# Altium PCB FunKello.PcbDoc
Units mm, origin at the board's own origin, x right, y up, seen from the top; angles counter-clockwise.
Board outline 145 x 33.3 mm, 2 copper layers (Top Layer, Bottom Layer), stack 1.671 mm thick; 59 components, 32 nets, 356 pads, 0 vias.
Unrouted connection lines stored in the file: 92.
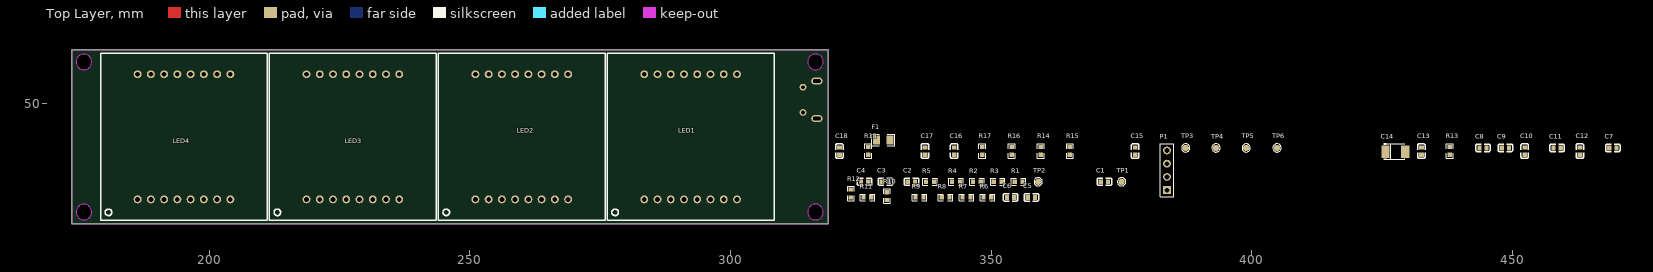
[diagram p0: Top Layer view]
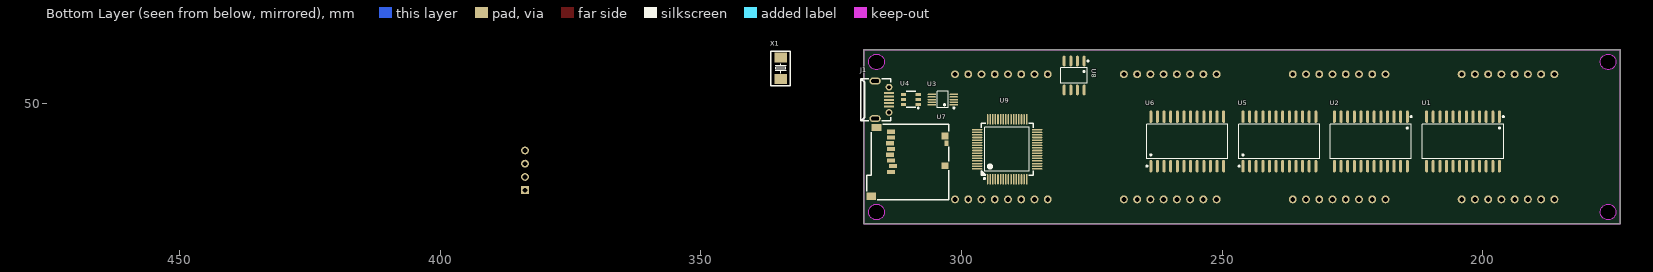
[diagram p1: Bottom Layer view, seen from below]

## Layer stack, top to bottom
Top Solder: solder mask 0.0102, Solder Resist, Dk 3.5
Top Layer: signal copper 0.0356
Dielectric 1: dielectric 1.6, FR-4, Dk 4.8
Bottom Layer: signal copper 0.0356
Bottom Solder: solder mask 0.0102, Solder Resist, Dk 3.5

## Board outline
173.7,27 318.7,27 318.7,60.3 173.7,60.3
cut-out: 314.8,29.2 ccw(c316.3,29.2) 316.3,27.7 ccw(c316.3,29.2) 317.8,29.2 ccw(c316.3,29.2) 316.3,30.7 ccw(c316.3,29.2)
cut-out: 314.8,58 ccw(c316.3,58) 316.3,56.5 ccw(c316.3,58) 317.8,58 ccw(c316.3,58) 316.3,59.5 ccw(c316.3,58)
cut-out: 174.5,29.2 ccw(c176,29.2) 176,27.7 ccw(c176,29.2) 177.5,29.2 ccw(c176,29.2) 176,30.7 ccw(c176,29.2)
cut-out: 174.5,58 ccw(c176,58) 176,56.5 ccw(c176,58) 177.5,58 ccw(c176,58) 176,59.5 ccw(c176,58)

## Design rules (kind name [scope] priority, off if disabled: settings)
Clearance [All] p1: gap=0.2
PolygonConnect [All] p1: connectstyle=Relief reliefconductorwidth=0.254 reliefentries=4 polygonreliefangle="90 Angle" airgapwidth=0.254
RoutingVias [All] p1: holewidth=0.711 width=1.27 viastyle="Through Hole" minholewidth=0.711 minwidth=1.27 maxholewidth=0.711 maxwidth=1.27
SolderMaskExpansion [All] p1: expansion=0.102
Width [All] p1: maxlimit=0.254 minlimit=0.254 preferedwidth=0.254
30 further rules are at their usual default settings.

## Classes and differential pairs
component class MCU: C7 C8 C9 C10 C11 C12 C13 C14 C15 C16 C17 C18 P1 R13 R14 R15 R16 R17 R18 TP3 TP4 TP5 TP6 U8 U9 X1
component class SD: C5 C6 R6 R7 R8 R9 R10 R11 R12 U7
component class TinyKello: LED1 LED2 LED3 LED4 U1 U2 U5 U6
component class USB: C1 C2 C3 C4 F1 F? J1 J? R1 R2 R3 R4 R5 TP1 TP2 U3 U4 U?

## Components (designator, comment, footprint, x,y, rotation, side; value= is the part's Value field where it differs from the comment)
C1 "100nF(104) ±10% 50V  0603" C0603 371,35 r0 top
C2 "100nF(104) ±10% 50V  0603" C0603 334,35 r0 top
C3 "10uF(106) ±10% 10V" C0603 329,35 r0 top
C4 "100nF(104) ±10% 50V  0603" C0603 325,35 r0 top
C5 "4.7uF(475) ±10% 50V 0603" C0603 357,32 r0 top
C6 "100nF(104) ±10% 50V 0603" C0603 353,32 r0 top
C7 "100nF(104) ±10% 50V  0603" C0603 468.499,41.5 r0 top
C8 "10uF(106) ±10% 10V  0603" C0603 443.599,41.5 r0 top
C9 "100nF(104) ±10% 50V  0603" C0603 447.899,41.5 r0 top
C10 "10uF(106) ±10% 10V  0603" C0603 452.299,40.2 r90 top
C11 "100nF(104) ±10% 50V  0603" C0603 457.799,41.5 r0 top
C12 "10uF(106) ±10% 10V  0603" C0603 462.899,40.2 r90 top
C13 "100nF(104) ±10% 50V  0603" C0603 432.499,40.2 r90 top
C14 "47uF(476) ±20% 10V  钽电容" CASE-B_3528 425.599,40.8 r0 top
C15 "100nF(104) ±10% 50V  0603" C0603 377.599,40.2 r90 top
C16 "100nF(104) ±10% 50V  0603" C0603 342.899,40.2 r90 top
C17 "20pF(200) ±1% 50V  0603" C0603 337.299,40.2 r90 top
C18 "20pF(200) ±1% 50V  0603" C0603 320.899,40.2 r90 top
F1 "6V 1.5A 1206 PTC自恢复保险丝" F1206 328,43 r0 top
J1 "MicroUSB母座 牛角 卷边" "MICRO USB 母座 小牛角有柱 卷边" 313.9,53.15 r270 bottom
LED1 "" matrix_led 283.464,31.626 r0 top locked
LED2 "" matrix_led 251.079,31.626 r0 top locked
LED3 "" matrix_led 218.694,31.626 r0 top locked
LED4 "" matrix_led 186.309,31.626 r0 top locked
P1 "SWD" HDR1X4 383.699,33.4 r90 top
R1 "33Ω(330) ±5%  0603" R0603 356,35 r0 top
R2 "33Ω(330) ±5%  0603" R0603 348,35 r0 top
R3 "33Ω(330) ±5%  0603" R0603 352,35 r0 top
R4 "33Ω(330) ±5%  0603" R0603 344,35 r0 top
R5 "1MΩ(1004) ±1%  0603" R0603 339,35 r0 top
R6 "10KΩ(10K) ±5% 0603" R0603 350,32 r0 top
R7 "10KΩ(10K) ±5% 0603" R0603 346,32 r0 top
R8 "10KΩ(10K) ±5% 0603" R0603 342,32 r0 top
R9 "33Ω(33R0) ±1%  0603" R0603 337,32 r0 top
R10 "10KΩ(10K) ±5% 0603" R0603 330,33 r90 top
R11 "10KΩ(10K) ±5% 0603" R0603 327,32 r0 top
R12 "10KΩ(10K) ±5% 0603" R0603 323.1,33.506 r90 top
R13 "0Ω ±1%" R0603 437.899,41.7 r90 top
R14 "10KΩ(10K) ±5% 0603" R0603 359.499,41.7 r90 top
R15 "10KΩ(10K) ±5% 0603" R0603 365.099,41.7 r90 top
R16 "10KΩ(10K) ±5% 0603" R0603 353.899,41.7 r90 top
R17 "10KΩ(10K) ±5% 0603" R0603 348.299,41.7 r90 top
R18 "1MΩ(1004) ±1%  0603" R0603 326.399,41.7 r90 top
TP1 "NC" TP 375,35 r90 top
TP2 "NC" TP 359,35 r90 top
TP3 "NC" TP 387.299,41.5 r90 top
TP4 "NC" TP 393.099,41.5 r90 top
TP5 "NC" TP 398.899,41.5 r90 top
TP6 "NC" TP 404.799,41.5 r90 top
U1 "MAX7219M" SOP-24_300mil 201.157,44.237 r0 bottom
U2 "MAX7219M" SOP-24_300mil 218.835,44.237 r0 bottom
U3 "CH340E" MSOP-10 303.7,50.3 r90 bottom
U4 "PTLC0514TS" SOT-236 311.1,51.75 r180 bottom
U5 "MAX7219M" SOP-24_300mil 241.705,41.251 r180 bottom
U6 "MAX7219M" SOP-24_300mil 259.383,41.251 r180 bottom
U7 "TXGA(特思嘉)/SD卡连接器 自弹式(H1.9)(内焊)/FCD407-6M" "Micro SD" 303.15,43.8 r270 bottom
U8 "AT24C02" SOIC-8_150mil 278.4,55.5 r0 bottom
U9 "AT32F415RBT7" LQFP64 297,45 r180 bottom
X1 "8MHz 20pF 20ppm/ TXC(台湾晶技)/7A08000001" CRY5032_2P_SMT 334.7,54.7 r90 bottom

## Footprints (in the part's own frame and the unit in brackets; to place one, negate y for a bottom-side part, rotate by r counter-clockwise, add the part's x,y. Pads: shape width x height; smd on the part's side, far side on the other; paste and mask are expansions set on the pad)
C0603 [mm]
  rect 0.8x0.9 smd: 1(0,0) 2(1.4,0)
  silkscreen extent -0.7,-0.7 2.1,0.72, body extent -0.17,-0.4 1.43,0.4, height 0.3
CASE-B_3528 [mm]
  rect 1.607x2.376 smd: 1(0,0) 2(3.822,0)
  silkscreen extent -0.3,-1.55 3.74,1.55, body extent 0.15,-1.56 3.85,1.37, height 2.03
CRY5032_2P_SMT [mm] "5032-2P贴片晶振"
  rect 1.9x2.4 smd: 1(0,0) 2(4.1,0)
  silkscreen extent -1.27,-1.85 5.38,1.85, body extent -0.5,-1.6 4.5,1.6, height 1.3
F1206 [mm]
  rect 1.293x1.782 smd: 1(0,0) 2(2.593,0)
  silkscreen extent -0.88,-1.12 3.47,1.12, body extent -0.3,-0.85 3.1,0.85, height 0.8
HDR1X4 [mm] "Connector; Header; 4 Position"
  rect 1.5x1.5 hole 0.9: 1(0,0)
  round 1.5 hole 0.9: 2(2.54,0) 3(5.08,0) 4(7.62,0)
  silkscreen extent -1.27,-1.27 8.89,1.27
LQFP64 [mm]
  oval 0.3x2 smd: 1(2,-9.5) 2(2.5,-9.5) 3(3,-9.5) 4(3.5,-9.5) 5(4,-9.5) 6(4.5,-9.5) 7(5,-9.5) 8(5.5,-9.5) 9(6,-9.5) 10(6.5,-9.5) 11(7,-9.5) 12(7.5,-9.5) 13(8,-9.5) 14(8.5,-9.5) 15(9,-9.5) 16(9.5,-9.5) 33(9.5,2) 34(9,2) 35(8.5,2) 36(8,2) 37(7.5,2) 38(7,2) 39(6.5,2) 40(6,2) 41(5.5,2) 42(5,2) 43(4.5,2) 44(4,2) 45(3.5,2) 46(3,2) 47(2.5,2) 48(2,2)
  oval 2x0.3 smd: 17(11.5,-7.5) 18(11.5,-7) 19(11.5,-6.5) 20(11.5,-6) 21(11.5,-5.5) 22(11.5,-5) 23(11.5,-4.5) 24(11.5,-4) 25(11.5,-3.5) 26(11.5,-3) 27(11.5,-2.5) 28(11.5,-2) 29(11.5,-1.5) 30(11.5,-1) 31(11.5,-0.5) 32(11.5,0) 49(0,0) 50(0,-0.5) 51(0,-1) 52(0,-1.5) 53(0,-2) 54(0,-2.5) 55(0,-3) 56(0,-3.5) 57(0,-4) 58(0,-4.5) 59(0,-5) 60(0,-5.5) 61(0,-6) 62(0,-6.5) 63(0,-7) 64(0,-7.5)
  silkscreen extent 0.75,-9.54 10.75,1.25, body extent -0.36,-9.75 11.79,2.39, height 1.62
matrix_led [mil] "点阵LED 32*32MM"
  round 60 hole 36: 1(0,0) 2(100,0) 3(200,0) 4(300,0) 5(400,0) 6(500,0) 7(600,0) 8(700,0) 9(700,944.88) 10(600,944.88) 11(500,944.88) 12(400,944.88) 13(300,944.88) 14(200,944.88) 15(100,944.88) 16(0,944.88)
  silkscreen extent -280,-157 980,1102, body extent -275,-160 985,1100, height 280
"Micro SD" [mm]
  rect 0.8x1.5 smd: 1(6.9,-10.36) 2(5.8,-9.96) 3(4.7,-10.36) 4(3.6,-10.56) 5(2.5,-10.36) 6(1.4,-10.56) 7(0.3,-10.36) 8(-0.8,-10.36)
  rect 1x0.85 smd: 9(1.39,0.275)
  rect 1.4x1.9 smd: 10(-1.6,-13.15) 10(11.55,-14.15)
  rect 1.3x1.4 smd: 10(0,0) 10(5.7,0)
  silkscreen extent -2.26,-15.07 12.21,0.68, body extent -2.25,-14.52 11.85,0.68, height 2
"MICRO USB 母座 小牛角有柱 卷边" [mm]
  rect 0.4x2 smd: 1(1.125,-0.008) 2(1.775,-0.008) 3(2.425,-0.008) 4(3.075,-0.008) 5(3.725,-0.008)
  round 1.3 hole 0.7: 6(4.85,0) 9(0,0)
  oval 1.3x2.2 hole 0.7 slot 1.5 at 90 deg: 7(6.025,-2.67) 8(-1.175,-2.67)
  silkscreen extent -1.58,-5.41 6.42,0.34, body extent -1.35,-4.87 6.15,0.63, height 2.62
MSOP-10 [mm]
  oval 0.28x1.62 smd: 1(-0.528,-2.238) 2(-0.028,-2.238) 3(0.472,-2.238) 4(0.972,-2.238) 5(1.472,-2.238) 6(1.472,1.982) 7(0.972,1.982) 8(0.472,1.982) 9(-0.028,1.982) 10(-0.528,1.982)
  silkscreen extent -1.27,-2.39 2.05,0.94, body extent -1,-2.75 2,2.15, height 1.15
R0603 [mm]
  rect 0.806x0.864 smd: 1(-1.506,0) 2(0,0)
  silkscreen extent -2.14,-0.66 0.63,0.66, body extent -1.6,-0.4 0,0.4, height 0.3
SOIC-8_150mil [mm]
  oval 0.588x2.045 smd: 1(-1.897,-2.66) 2(-0.627,-2.66) 3(0.643,-2.66) 4(1.913,-2.66) 5(1.913,2.885) 6(0.643,2.885) 7(-0.627,2.885) 8(-1.897,2.885)
  silkscreen extent -2.79,-2.81 2.53,1.63, body extent -2.5,-3.2 2.5,3, height 1.75
SOP-24_300mil [mm]
  oval 0.574x2.388 smd: 1(-4.317,-3.251) 2(-3.047,-3.251) 3(-1.777,-3.251) 4(-0.507,-3.251) 5(0.763,-3.251) 6(2.033,-3.251) 7(3.303,-3.251) 8(4.573,-3.251) 9(5.843,-3.251) 10(7.113,-3.251) 11(8.383,-3.251) 12(9.653,-3.251) 13(9.653,6.237) 14(8.383,6.237) 15(7.113,6.237) 16(5.843,6.237) 17(4.573,6.237) 18(3.303,6.237) 19(2.033,6.237) 20(0.763,6.237) 21(-0.507,6.237) 22(-1.777,6.237) 23(-3.047,6.237) 24(-4.317,6.237)
  silkscreen extent -5.21,-3.4 10.44,4.81, body extent -5.15,-3.8 10.55,6.66, height 2.54
SOT-236 [mm]
  rect 1x0.55 smd: 1(2.8,-1.9) 2(2.8,-0.95) 3(2.8,0) 4(0,0) 5(0,-0.95) 6(0,-1.9)
  silkscreen extent 0.5,-2.73 2.92,0.6, body extent 0.33,-2.36 2.67,0.56, height 1
TP [mm]
  round 1.2 smd: 1(0,0)
  silkscreen extent -0.8,-0.8 0.8,0.8

## Part data
C1 C2 C3 C4 C7 C8 C9 C10 C11 C12 C13 C15 C16 C17 C18: library part Cap, "0603贴片电容"
C5 C6: library part Cap, "Capacitor"
C14: library part "Cap Pol2", "CASE_B 3528钽电容"
F1: library part ASMD1206-150, "1206 PTC自恢复保险丝"
J1: library part CMP-0029-00002-1, "MicroUSB母座"
LED1 LED2 LED3 LED4: library part SLD0888DWC1BY
P1: library part "Header 4", "编程下载口"
R1 R2 R3 R4 R5 R13 R14 R15 R16 R17 R18: library part Res1, "0603贴片电阻"
R6 R7 R8 R9 R10 R11 R12: library part Res1, "Resistor"
TP1 TP2 TP3 TP4 TP5 TP6: library part TP, "测试点"
U3: "USB转串口IC"
U7: library part "SD CARD/FCD407-6M"
U8: library part 24CXX, "非易失性存储器(ROM)"
X1: library part XTAL_SMD, "无源晶振  SMD-5032_2P"

## Nets (pads, with @x,y where several pads share a name; then routed paths per layer and width w, separated by ;. In a path a pad name is that pad's centre, name@x,y a point inside that pad or via, vN(x,y) a via of type N, cw(c..) or ccw(c..) an arc to the next point about the centre after c; other vN are vias at no path point)
+3V3_CH340E: C3.2 C4.1 U3.7
+3V3_MAIN: C7.2 C8.2 C9.2 C10.2 C11.2 C12.2 C15.2 P1.4 R14.2 R15.2 R16.1 TP6.1 U8.8
+3V3_MIAN: C5.1 C6.2 R6.2 R7.2 R8.2 R10.2 R11.2 R12.2 U7.4
+3V3_TLV2333: C13.2 C14.1
+USB_VBUS: F1.2
+VBUS: F1.1 J1.1 U4.5
DM: J1.2 R1.2 U4.4
DP: J1.3 R2.2 U4.6
E0: C2.1 J1.6 J1.7 J1.8 J1.9 R5.1 U7.10
EE_SCL: R15.1 U8.6
EE_SDA: R14.1 U8.5
GND: C1.1 C2.2 C3.1 C4.2 C5.2 C6.1 C7.1 C8.1 C9.1 C10.1 C11.1 C12.1 C13.1 C14.2 C15.1 C16.1 C17.1 C18.1 J1.5 P1.3 R5.2 R13.1 R17.1 TP5.1 U3.3 U4.2 U7.6 U8.1 U8.2 U8.3 U8.4 U8.7
NetC1_2: C1.2 U3.10
NetC16_2: C16.2 R16.2
NetR1_1: R1.1 U3.2
NetR2_1: R2.1 U3.1
NetR3_1: R3.1 TP1.1
NetR3_2: R3.2 U3.9
NetR4_1: R4.1 TP2.1
NetR4_2: R4.2 U3.8
NetR9_1: R9.1 U7.5
OSC8M_1: C17.2 R18.1 X1.2
OSC8M_2: C18.2 R18.2 X1.1
SDIO_CLK: R9.2
SDIO_CMD: R8.1 U7.3
SDIO_D0: R10.1 U7.7
SDIO_D1: R11.1 U7.8
SDIO_D2: R6.1 U7.1
SDIO_D3: R7.1 U7.2
SDIO_SWI: R12.1 U7.9
SWCLK: P1.1 TP3.1
SWDIO: P1.2 TP4.1
pads on no net: J1.4 LED1.1 LED1.2 LED1.3 LED1.4 LED1.5 LED1.6 LED1.7 LED1.8 LED1.9 LED1.10 LED1.11 LED1.12 LED1.13 LED1.14 LED1.15 LED1.16 LED2.1 LED2.2 LED2.3 LED2.4 LED2.5 LED2.6 LED2.7 LED2.8 LED2.9 LED2.10 LED2.11 LED2.12 LED2.13 LED2.14 LED2.15 LED2.16 LED3.1 LED3.2 LED3.3 LED3.4 LED3.5 LED3.6 LED3.7 LED3.8 LED3.9 LED3.10 LED3.11 LED3.12 LED3.13 LED3.14 LED3.15 LED3.16 LED4.1 LED4.2 LED4.3 LED4.4 LED4.5 LED4.6 LED4.7 LED4.8 LED4.9 LED4.10 LED4.11 LED4.12 LED4.13 LED4.14 LED4.15 LED4.16 R13.2 R17.2 U1.1 U1.2 U1.3 U1.4 U1.5 U1.6 U1.7 U1.8 U1.9 U1.10 U1.11 U1.12 U1.13 U1.14 U1.15 U1.16 U1.17 U1.18 U1.19 U1.20 U1.21 U1.22 U1.23 U1.24 U2.1 U2.2 U2.3 U2.4 U2.5 U2.6 U2.7 U2.8 U2.9 U2.10 U2.11 U2.12 U2.13 U2.14 U2.15 U2.16 U2.17 U2.18 U2.19 U2.20 U2.21 U2.22 U2.23 U2.24 U3.4 U3.5 U3.6 U4.1 U4.3 U5.1 U5.2 U5.3 U5.4 U5.5 U5.6 U5.7 U5.8 U5.9 U5.10 U5.11 U5.12 U5.13 U5.14 U5.15 U5.16 U5.17 U5.18 U5.19 U5.20 U5.21 U5.22 U5.23 U5.24 U6.1 U6.2 U6.3 U6.4 U6.5 U6.6 U6.7 U6.8 U6.9 U6.10 U6.11 U6.12 U6.13 U6.14 U6.15 U6.16 U6.17 U6.18 U6.19 U6.20 U6.21 U6.22 U6.23 U6.24 U9.1 U9.2 U9.3 U9.4 U9.5 U9.6 U9.7 U9.8 U9.9 U9.10 U9.11 U9.12 U9.13 U9.14 U9.15 U9.16 U9.17 U9.18 U9.19 U9.20 U9.21 U9.22 U9.23 U9.24 U9.25 U9.26 U9.27 U9.28 U9.29 U9.30 U9.31 U9.32 U9.33 U9.34 U9.35 U9.36 U9.37 U9.38 U9.39 U9.40 U9.41 U9.42 U9.43 U9.44 U9.45 U9.46 U9.47 U9.48 U9.49 U9.50 U9.51 U9.52 U9.53 U9.54 U9.55 U9.56 U9.57 U9.58 U9.59 U9.60 U9.61 U9.62 U9.63 U9.64

## Keep-outs
Keep-Out Layer:
  the board outline again, w0.254

## Silkscreen, mask and mechanical layers (free items; w line width, h text height)
Drill Guide:
  circle w0.254: c176,29.2 r1.5
  circle w0.254: c176,58 r1.5
  circle w0.254: c316.3,29.2 r1.5
  circle w0.254: c316.3,58 r1.5